# EAGLE board PE10_version2 (EAGLE 9.6.2)
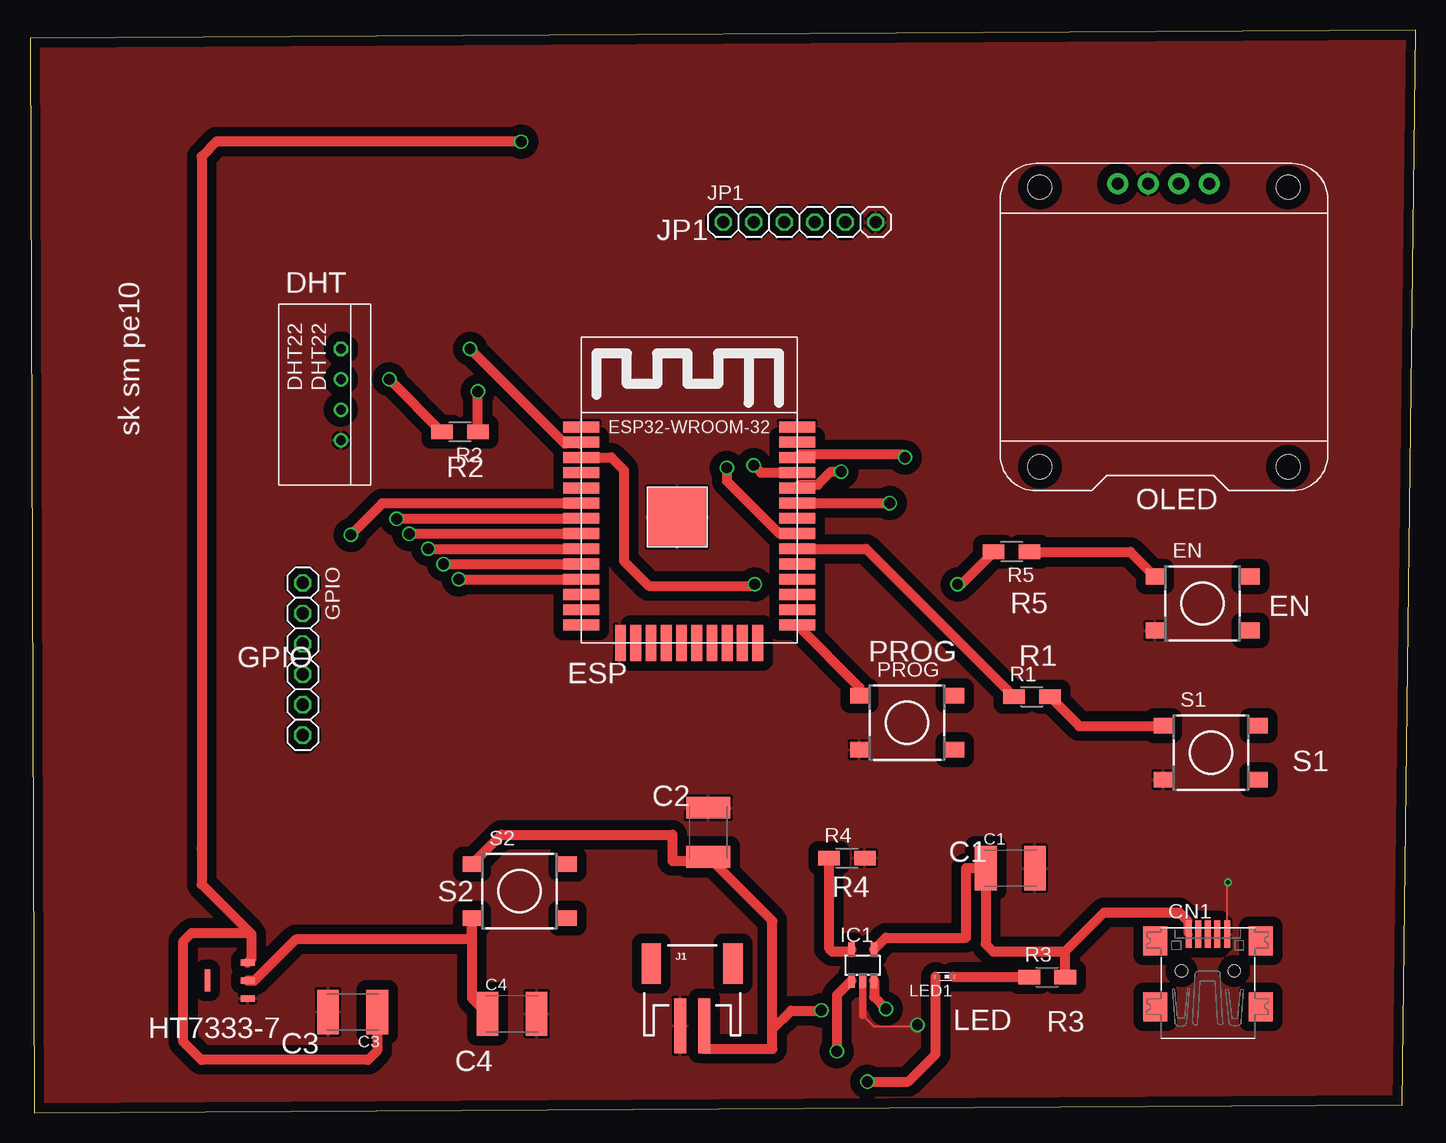
[diagram p0: board, top side]
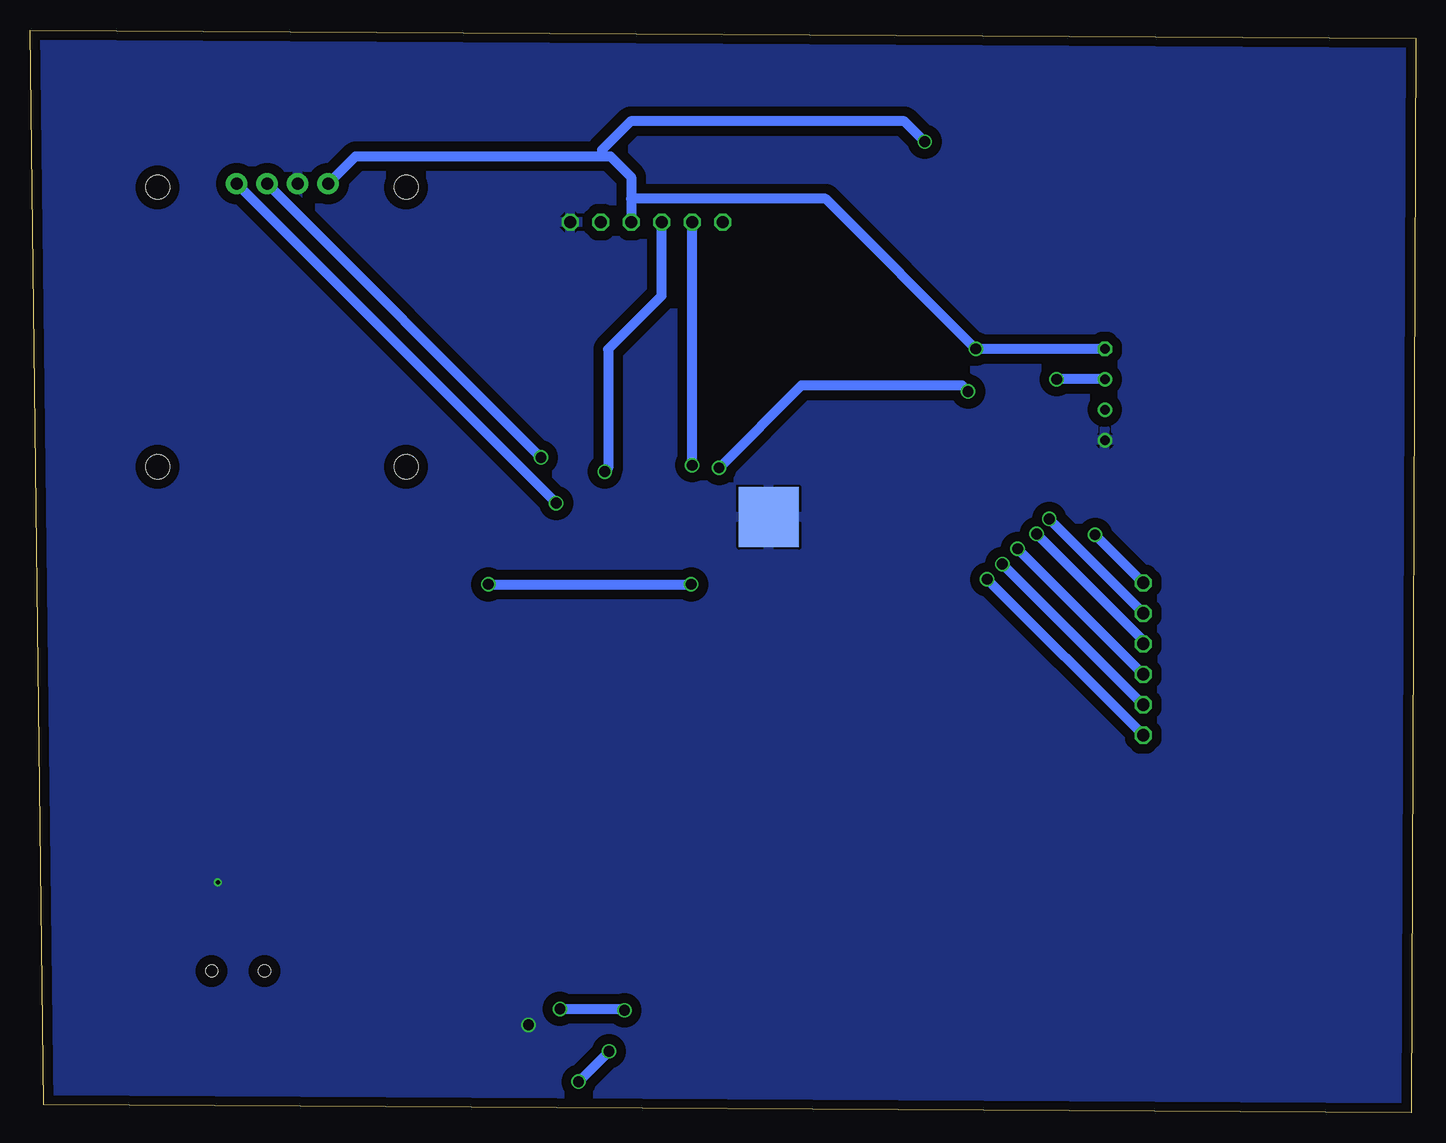
[diagram p1: board, bottom side, seen from below]

Size 115.49 x 90.29 mm. Coordinates in mm from the lower left corner, seen from the top.
Outline: 0.37,0 114.36,0.67 115.49,90.29 0,89.62 0.37,0
Copper layers (1*16): Top 0.035mm / dielectric 1.5mm / Bottom 0.035mm
Design rules "Aetzwerk-DRC 2 Lagen 35µm Cu": minimum track width 6mil, minimum drill 12mil, track to track 6mil, track to pad 6mil, pad to pad 6mil, via to via 6mil, smd to smd 6mil, copper to edge 20mil, drill to drill 8mil, minimum pad ring 8mil, minimum via ring 6mil, stop-mask expansion 3mil, vias tented up to drill 0mil, thermal gap 8mil

## Footprints (pad centres in the part's own frame; a part is rotated, then mirrored left to right if it is on the bottom)
C1812K = smd 1.8 x 3.7: 1 -2.05,0; 2 2.05,0
USB-MINIB = smd 0.5 x 2.308: D+ 0,4.064; D- -0.8,4.064; GND 1.6,4.064; ID 0.8,4.064; VBUS -1.6,4.064 | smd 2 x 2.4: GND1 -4.4,-2; GND2 -4.4,3.5; GND3 4.4,3.5; GND4 4.4,-2 | hole 1: -2.2,1; 2.2,1
RHT03_DHT-22 = drill 0.8: DATA -1.27,0; GND 3.81,0; NULL 1.27,0 | drill 0.8 octagon: VDD -3.81,0
DTSM-6 = smd 1.55 x 1.3: 1 -3.975,2.25; 2 3.975,2.25; 3 -3.975,-2.25; 4 3.975,-2.25
1X06 = drill 1.016 octagon: 1 -6.35,0; 2 -3.81,0; 3 -1.27,0; 4 1.27,0; 5 3.81,0; 6 6.35,0
SOT89 = smd 0.559 x 1.194: GND -1.499,-0.597; VIN 0,-0.597; VOUT 1.499,-0.597 | smd 1.829 x 0.457: P$4 0,2.743
SOT23-5L = smd 0.55 x 1.2: 1 -0.95,-1.3; 2 0,-1.3; 3 0.95,-1.3; 4 0.95,1.3; 5 -0.95,1.3
JST-2-SMD = smd 1 x 4.6: 1 -1,-3.7; 2 1,-3.7 | smd 1.6 x 3.4: NC1 -3.4,1.5; NC2 3.4,1.5
SMART-LED = smd 0.35 x 0.35: A 0,0.725; B 0,-0.725
OLED_0.96_I2C = drill 1 pad 1.778: GND -1.63,11.63; SCL 0.91,11.63; SDA 3.45,11.63; VCC -4.17,11.63 | hole 2: -10.67,-11.97; 10.03,-11.97; 10.03,11.33; -10.67,11.33
R1206W = smd 1.8 x 1.2: 1 -1.499,0; 2 1.499,0
ESP32-WROOM = smd 3 x 0.9: 3V3 0,16.74; EN 0,15.47; GND1 0,18.01; GND3 18,18.01; IO0 18,1.5; IO4 18,2.77; IO5 18,6.58; IO12 0,1.5; IO14 0,2.77; IO16 18,4.04; IO17 18,5.31; IO18 18,7.85; IO19 18,9.12; IO21 18,11.66; IO22 18,15.47; IO23 18,16.74; IO25 0,6.58; IO26 0,5.31; IO27 0,4.04; IO32 0,9.12; IO33 0,7.85; IO34 0,11.66; IO35 0,10.39; NC 18,10.39; RX 18,12.93; SENSOR_VN 0,12.93; SENSOR_VP 0,14.2; TX 18,14.2 | smd 0.9 x 3: CLK 9.635,0; CMD 8.365,0; GND2 3.285,0; IO2 14.715,0; IO13 4.555,0; IO15 13.445,0; SD0 10.905,0; SD1 12.175,0; SD2 5.825,0; SD3 7.095,0 | smd 5 x 5: GND4 8,10.5 | smd 5 x 5 bottom: GND5 8,10.5

## Placement (x,y rotation side)
C1  4.7UF  [C1812K]  81.69,20.41 0 top
C2  4.7uF  [C1812K]  56.52,23.4 90 top
C3  10uF  [C1812K]  26.88,8.43 180 top
C4  10uF  [C1812K]  40.17,8.27 0 top
CN1  CN1  [USB-MINIB]  98.15,10.85 0 top
DHT22  DHT22  [RHT03_DHT-22]  25.91,59.9 270 top
EN  DTSM-6  [DTSM-6]  97.72,42.48 0 top
GPIO  [1X06]  22.73,37.85 270 top
HT7333-7  HT7333  [SOT89]  17.54,11.05 90 top
IC1  MCP73831/OT  [SOT23-5L]  69.39,12.33 0 top
J1  5V  [JST-2-SMD]  55.18,10.96 0 top
JP1  JP1  [1X06]  64.12,74.27 0 top
LED1  RED  [SMART-LED]  76.2,11.36 90 top
OLED0.96  OLED_0.96_I2C  [OLED_0.96_I2C]  94.82,65.84 0 top
PROG  DTSM-6  [DTSM-6]  73.08,32.54 0 top
R1  10k  [R1206W]  83.51,34.7 0 top
R2  10k  [R1206W]  35.82,56.78 180 top
R3  470  [R1206W]  84.77,11.32 0 top
R4  2K  [R1206W]  68.07,21.26 0 top
R5  10k  [R1206W]  81.8,46.78 180 top
S1  DTSM-6  [DTSM-6]  98.41,30.04 0 top
S2  DTSM-6  [DTSM-6]  40.8,18.49 0 top
U$1  ESP32-WROOM  [ESP32-WROOM]  45.92,39.18 0 top

## Library data of the parts
C1-C4 = rcl; SPICEPREFIX: C
CN1 GPIO IC1 JP1 LED1 = adafruit
DHT22 = RHT03_DHT-22_AM2302; PROD_ID: SEN-10167
EN PROG S1 S2 = switch-tact
HT7333-7 = HT7333_SOT89
J1 = SparkFun-Connectors; PROD_ID: CONN-11443; SF_ID: PRT-08612
OLED0.96 = tft_1_8_1_44_oled_0_96
R1-R5 = rcl; SPICEPREFIX: R
U$1 = ESP32

## Nets
0: C1.2 C2.2 C3.2 C4.2 CN1.GND DHT22.GND EN.3 HT7333-7.GND IC1.2 J1.1 JP1.6 OLED0.96.GND PROG.3 R4.2 S1.3 U$1.GND1 U$1.GND2 U$1.GND3 U$1.GND4 U$1.GND5
3V3: C3.1 DHT22.VDD HT7333-7.VOUT JP1.4 OLED0.96.VCC U$1.3V3
18: R1.1 U$1.IO18
19: R2.1 U$1.IO19
GPIO1: GPIO.1 U$1.IO34
GPIO2: GPIO.2 U$1.IO35
GPIO3: GPIO.3 U$1.IO32
GPIO4: GPIO.4 U$1.IO33
GPIO5: GPIO.5 U$1.IO25
GPIO6: GPIO.6 U$1.IO26
N$1: OLED0.96.SCL U$1.IO22
N$2: OLED0.96.SDA U$1.IO21
N$3: DHT22.DATA R2.2
N$4: R1.2 S1.1
N$5: C1.1 CN1.VBUS IC1.4 R3.2
N$6: C4.1 HT7333-7.VIN S2.3
N$7: IC1.1 LED1.A
N$8: C2.1 IC1.3 J1.2 S2.1
N$9: LED1.B R3.1
N$10: EN.1 R5.1
N$12: IC1.5 R4.1
N$13: R5.2 U$1.EN
PROG: PROG.1 U$1.IO0
RX: JP1.2 U$1.TX
TX: JP1.3 U$1.RX

## Tracks (layer width: path | path; a pad name or v marks a point on that pad's centre or on a via)
0  (via drill 0.35, 0.9)
  Top 0.152: 69.39,8.16 70.33,7.22 73.83,7.22 v73.95,7.35 | CN1.GND 99.75,19.14 v99.83,19.22
  Top 0.61: IC1.2 69.39,8.16
  Top 0.813: C4.2 41.99,8.03 42.18,7.85 | EN.3 93.51,40.23
  pour Bottom (isolate 0.813): -4.44,97.49 -4.44,-5.32 126.33,-5.32 126.33,97.49
  pour Top (isolate 0.813): -12.67,98.72 126.83,98.72 140.83,84.72 140.83,5.72 118.83,-16.28 -21.17,-16.28 -21.67,-15.78 -21.67,81.22 -23.67,83.22 -23.67,87.72
3V3  (via drill 0.9)
  Top 0.813: U$1.3V3 45.8,55.81 44.57,55.81 v36.67,63.71 | v40.93,80.98 | v40.93,80.98 15.54,80.98 14.29,79.74 14.29,22.04 14.29,19.06 18.35,15 | HT7333-7.VOUT 18.44,12.85 18.44,14.91 18.35,15 | C3.1 28.93,5.19 28.18,4.43 14.28,4.43 12.78,5.92 12.78,14.32 13.47,15 18.35,15
  Bottom 0.813: OLED0.96.VCC 88.36,79.76 67.83,79.76 | 67.83,79.76 67.13,79.76 65.39,78.02 65.39,76.22 | 65.39,76.22 JP1.4 | DHT22.VDD v36.67,63.71 49.19,76.22 65.39,76.22 | v40.93,80.98 42.63,82.68 65.43,82.68 67.83,80.27 67.83,79.76
18
  Top 0.813: U$1.IO18 69.68,47.03 R1.1
19  (via drill 0.9)
  Top 0.813: R2.1 v37.32,60.15 | U$1.IO19 63.9,48.32 62.43,48.32 58.07,52.68 v58.07,53.78
  Bottom 0.813: v37.32,60.15 37.82,60.65 51.21,60.65 v58.07,53.78
GPIO1  (via drill 0.9)
  Top 0.813: U$1.IO34 45.89,50.82 29.35,50.82 v26.73,48.2
  Bottom 0.813: GPIO.1 v26.73,48.2
GPIO2  (via drill 0.9)
  Top 0.813: v30.55,49.53 45.87,49.53 U$1.IO35
  Bottom 0.813: v30.55,49.53 22.73,41.71 GPIO.2
GPIO3  (via drill 0.9)
  Top 0.813: U$1.IO32 45.89,48.28 v31.6,48.28
  Bottom 0.813: v31.6,48.28 22.73,39.41 GPIO.3
GPIO4  (via drill 0.9)
  Top 0.813: v33.19,47.03 U$1.IO33
  Bottom 0.813: GPIO.4 v33.19,47.03
GPIO5  (via drill 0.9)
  Top 0.813: v34.46,45.76 U$1.IO25
  Bottom 0.813: GPIO.5 v34.46,45.76
GPIO6  (via drill 0.9)
  Top 0.813: v35.73,44.49 U$1.IO26
  Bottom 0.813: GPIO.6 v35.73,44.49
N$1  (via drill 0.9)
  Top 0.813: U$1.IO22 64.17,54.9 72.66,54.9 v72.91,54.65
  Bottom 0.813: v72.91,54.65 OLED0.96.SCL
N$2  (via drill 0.9)
  Top 0.813: U$1.IO21 v71.64,50.84
  Bottom 0.813: v71.64,50.84 OLED0.96.SDA
N$3  (via drill 0.9)
  Top 0.813: v29.94,61.17 R2.2
  Bottom 0.813: DHT22.DATA v29.94,61.17
N$4
  Top 0.813: R1.2 87.42,32.29 87.42,32.26 94.4,32.26 S1.1
N$5
  Top 0.61: 96.44,16.05 96.44,15.02 CN1.VBUS
  Top 0.813: 86.27,13.47 86.26,13.48 80.24,13.48 79.64,14.07 C1.1 79.63,20.42 78.01,20.42 78.01,14.64 77.99,14.61 71.33,14.61 IC1.4 | R3.2 86.27,13.47 | 96.44,16.05 95.78,16.71 89.52,16.71 86.27,13.47
N$6
  Top 0.813: HT7333-7.VIN 18.73,11.05 22.15,14.47 36.83,14.47 S2.3 36.83,9.57 C4.1
N$7  (via drill 0.9)
  Top 0.813: v67.24,5.14 67.24,9.83 IC1.1 | v69.78,2.61 73.18,2.61 75.47,4.9 LED1.A
  Bottom 0.813: v67.24,5.14 v69.78,2.61
N$8  (via drill 0.9)
  Top 0.813: J1.2 56.18,5.35 61.87,5.35 61.87,6.97 | S2.1 39.29,23.2 53.53,23.2 53.53,21.01 55.49,21.01 55.6,21.13 56.3,21.13 C2.1 61.87,16 61.87,6.97 | v65.95,8.56 65.92,8.53 63.43,8.53 61.87,6.97 | IC1.3 70.34,9.67 v71.33,8.68
  Bottom 0.813: v71.33,8.68 66.07,8.68 v65.95,8.56
N$9
  Top 0.813: R3.1 83.23,11.36 LED1.B
N$10
  Top 0.813: R5.1 91.69,46.78 EN.1
N$12
  Top 0.813: R4.1 66.57,13.74 66.85,13.46 68.27,13.46 IC1.5
N$13  (via drill 0.9)
  Top 0.813: U$1.EN 48.44,54.65 49.5,53.6 49.5,46.02 51.58,43.94 60.27,43.94 v60.4,44.07 | R5.2 77.59,44.07 v77.3,44.07
  Bottom 0.813: v77.3,44.07 v60.4,44.07
PROG
  Top 0.813: U$1.IO0 69.11,35.5 PROG.1
RX  (via drill 0.9)
  Top 0.813: v60.31,54 60.93,53.38 U$1.TX
  Bottom 0.813: v60.31,54 JP1.2
TX  (via drill 0.9)
  Top 0.813: U$1.RX 64.18,52.38 65.65,52.38 66.74,53.47 v67.59,53.47
  Bottom 0.813: v67.59,53.47 67.31,53.75 67.31,63.67 62.85,68.14 JP1.3

## Text on the board
tNames: JP1 | DHT | sk sm pe10 | R2 | OLED | R5 | EN | GPIO | PROG | R1 | ESP | S1 | C2 | C1 | R4 | S2 | LED | R3 | HT7333-7 | C3 | C4